# Altium PCB pcb.PcbDoc (part 8 of 9)
Units mil, origin at the board's own origin, x right, y up, seen from the top; angles counter-clockwise.
Board outline 3937.01 x 3937.01 mil, 4 copper layers (Top Layer, Ground plane, Power plane, Bottom Layer), stack 51.4 mil thick; 310 components, 276 nets, 1704 pads, 977 vias.
Unrouted connection lines stored in the file: 44.
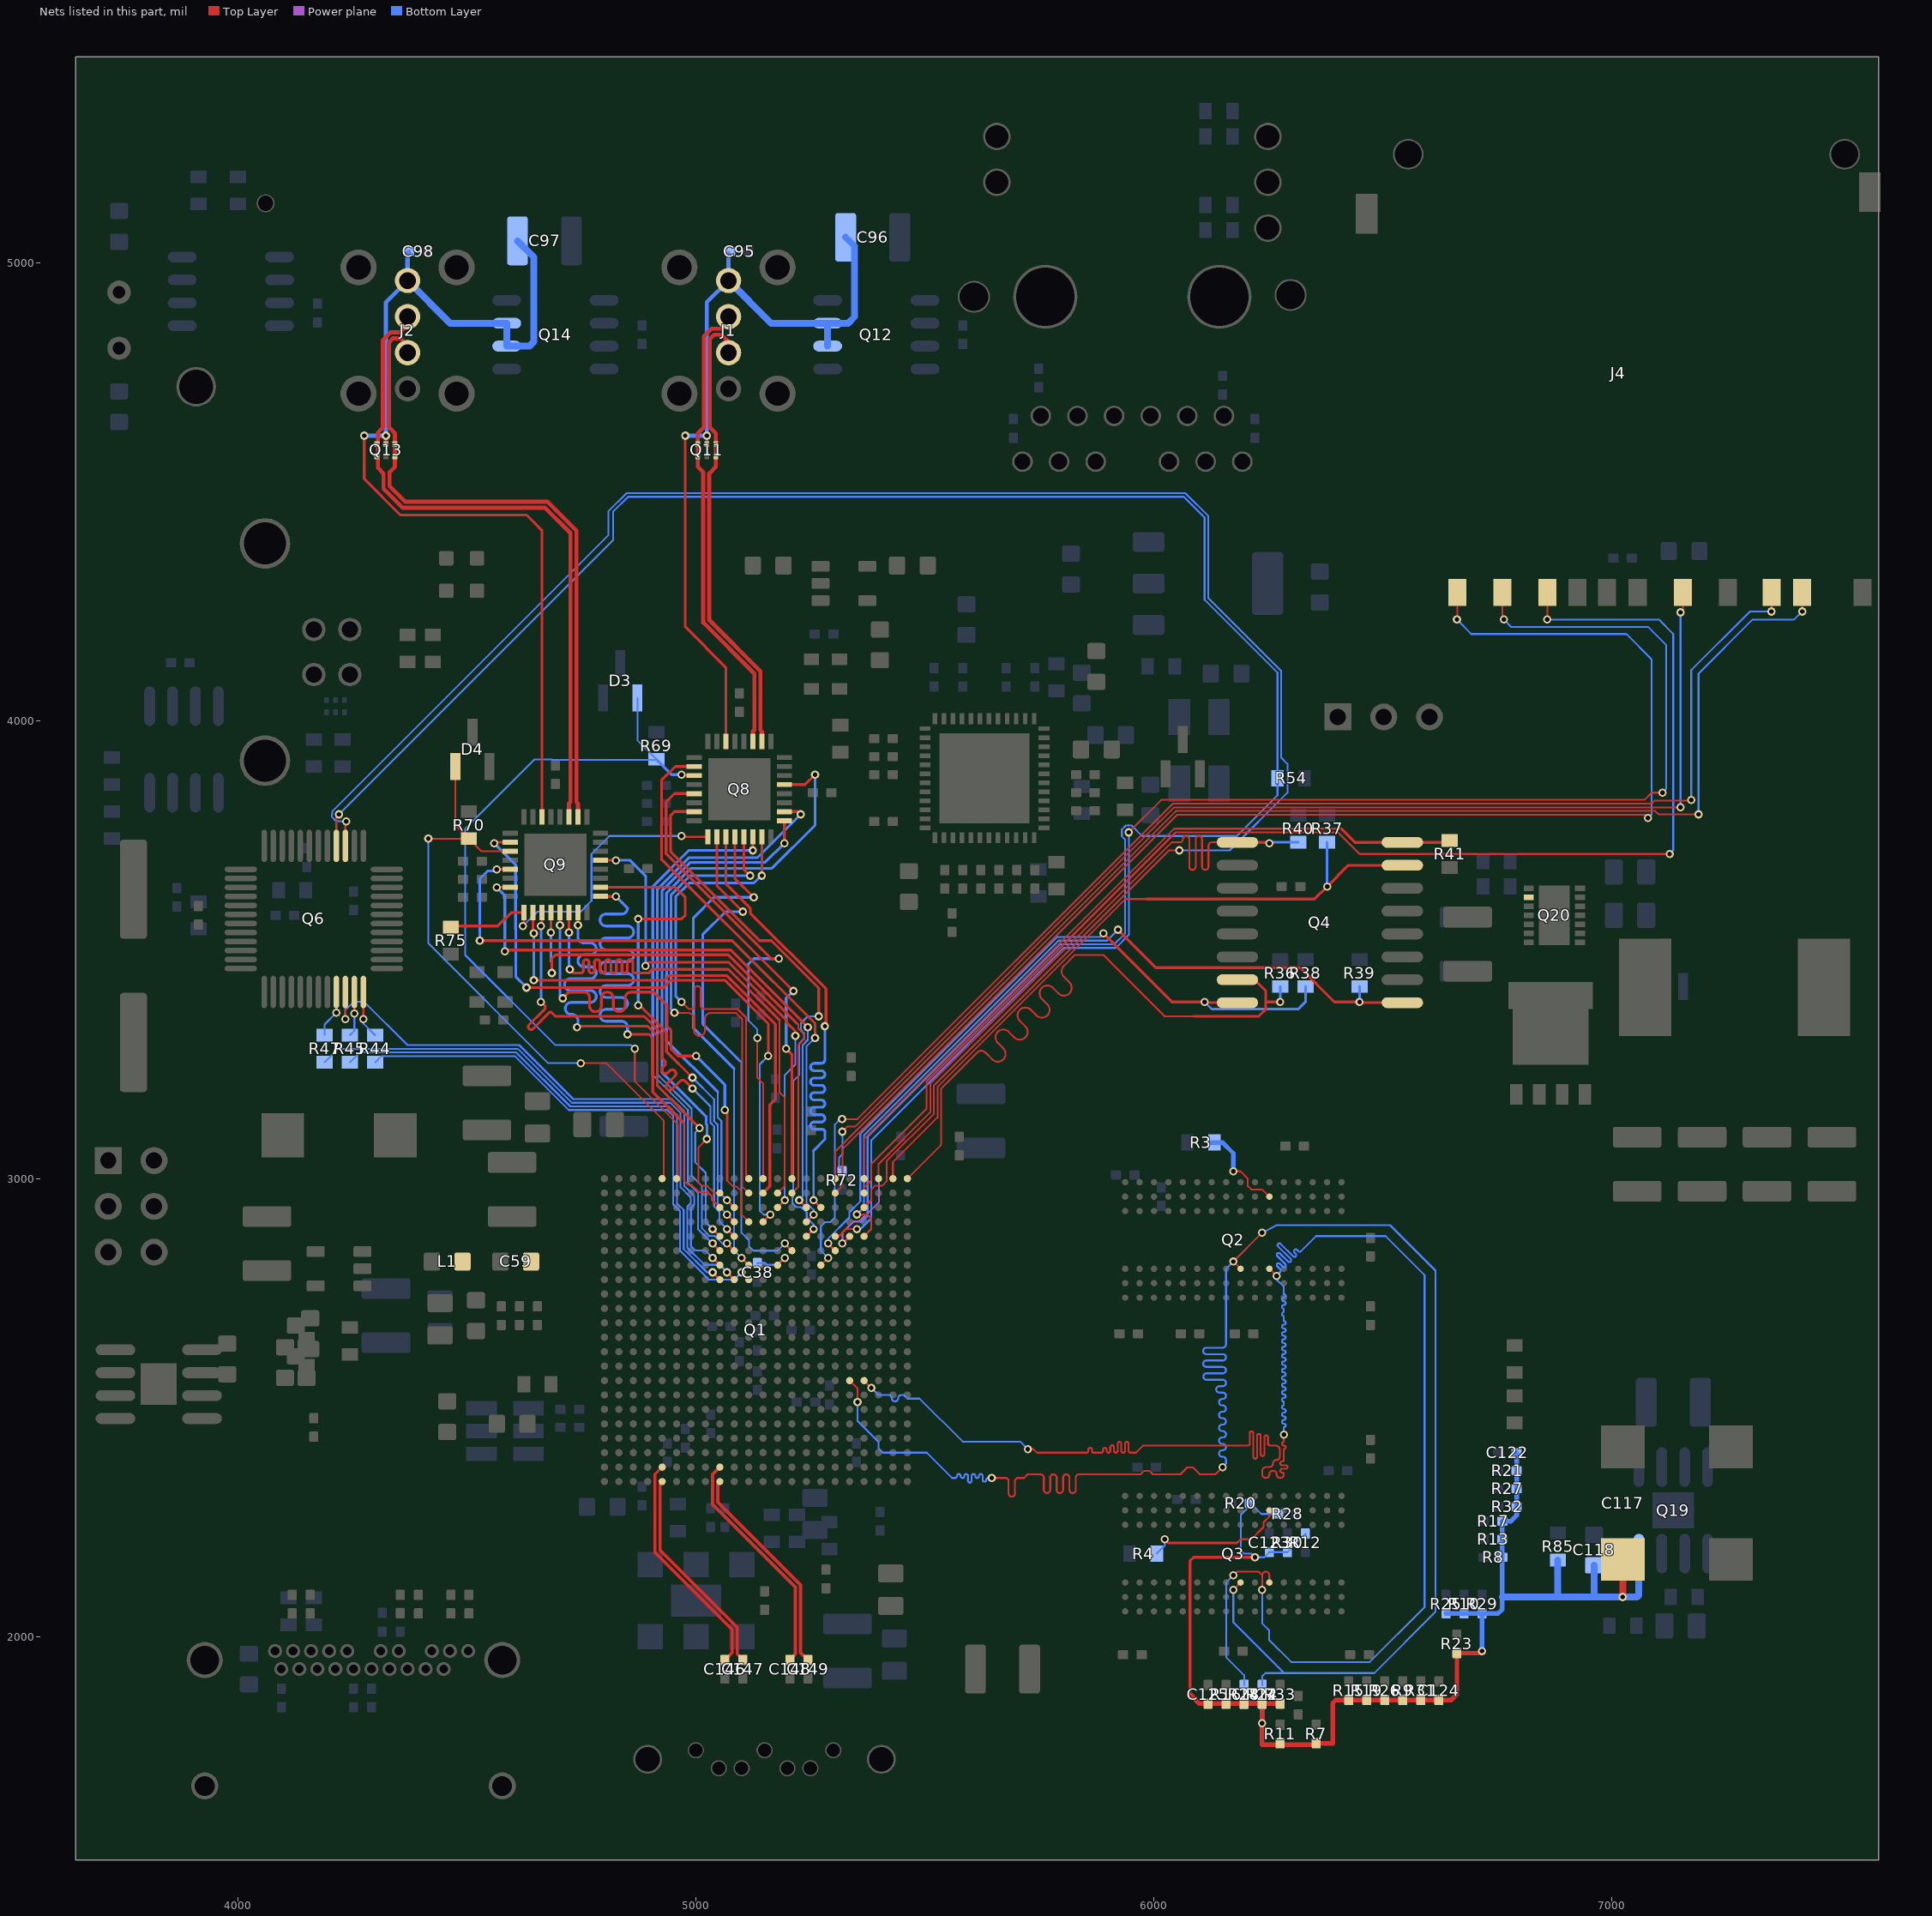
[diagram p9: the nets of this part, all layers, seen from the top]

## Via types
v1: diameter 18, hole 10, Top Layer to Bottom Layer, 932 vias
v2: diameter 19.68, hole 9.84, Top Layer to Bottom Layer, tented both sides, 18 vias
v3: diameter 19.68, hole 9.84, Top Layer to Bottom Layer, 16 vias
v4: diameter 19.68, hole 7.87, Top Layer to Bottom Layer, 11 vias

## Nets (pads, with @x,y where several pads share a name; then routed paths per layer and width w, separated by ;. In a path a pad name is that pad's centre, name@x,y a point inside that pad or via, vN(x,y) a via of type N, cw(c..) or ccw(c..) an arc to the next point about the centre after c; other vN are vias at no path point) (continued)
RAS: Q1.R18 Q2.J3 Q3.J3 R14.1 | length 4166.2
  Top Layer w4: Q1.R18@5335.43,2559.05 5352.62,2541.86 5352.62,2533.66 5352.5,2533.54 5352.5,2512.06 v1(5352.62,2511.93) ; v1(5645.67,2346.46) 5675.42,2346.46 cw(c5675.42,2339.46) 5682.42,2339.46 5682.42,2312.51 ccw(c5689.42,2312.51) 5689.42,2305.51 ccw(c5689.42,2312.51) 5696.42,2312.51 5696.42,2339.46 cw(c5703.42,2339.46) 5703.42,2346.46 5716.54,2346.46 5724.41,2354.33 5752.41,2354.33 cw(c5752.41,2347.33) 5759.41,2347.33 5759.41,2320.38 ccw(c5766.41,2320.38) 5766.41,2313.38 ccw(c5766.41,2320.38) 5773.41,2320.38 5773.41,2347.33 cw(c5780.41,2347.33) 5780.41,2354.33 cw(c5780.41,2347.33) 5787.41,2347.33 5787.41,2320.38 ccw(c5794.41,2320.38) 5794.41,2313.38 ccw(c5794.41,2320.38) 5801.41,2320.38 5801.41,2347.33 cw(c5808.41,2347.33) 5808.41,2354.33 cw(c5808.41,2347.33) 5815.41,2347.33 5815.41,2320.38 ccw(c5822.41,2320.38) 5822.41,2313.38 ccw(c5822.41,2320.38) 5829.41,2320.38 5829.41,2347.33 cw(c5836.41,2347.33) 5836.41,2354.33 5970.91,2354.33 5978.79,2362.2 5989.72,2362.2 5997.59,2354.33 6057.53,2354.33 6072.53,2369.33 6084.95,2369.33 6099.95,2354.33 6133.86,2354.33 v1(6149.61,2370.08) ; v1(6173.23,2102.36) Q3.J3@6188.98,2118.11 ; Q2.J3@6188.98,2803.15 v1(6173.23,2818.9) v1(6236.22,2881.89)
  Bottom Layer w4: v1(5352.62,2511.93) 5352.62,2471 5398.61,2425.01 5398.61,2410.88 5407.73,2401.76 5421.86,2401.76 5422.05,2401.57 5503.94,2401.57 5559.06,2346.46 5565.8,2346.46 ccw(c5565.8,2350.46) 5569.8,2350.46 5569.8,2350.95 cw(c5573.8,2350.95) 5573.8,2354.95 cw(c5573.8,2350.95) 5577.8,2350.95 5577.8,2350.46 ccw(c5581.8,2350.46) 5581.8,2346.46 ccw(c5581.8,2350.46) 5585.8,2350.46 5585.8,2350.95 cw(c5589.8,2350.95) 5589.8,2354.95 cw(c5589.8,2350.95) 5593.8,2350.95 5593.8,2340.19 ccw(c5597.8,2340.19) 5597.8,2336.19 ccw(c5597.8,2340.19) 5601.8,2340.19 5601.8,2350.95 cw(c5605.8,2350.95) 5605.8,2354.95 cw(c5605.8,2350.95) 5609.8,2350.95 5609.8,2350.46 ccw(c5613.8,2350.46) 5613.8,2346.46 ccw(c5613.8,2350.46) 5617.8,2350.46 5617.8,2350.95 cw(c5621.8,2350.95) 5621.8,2354.95 cw(c5621.8,2350.95) 5625.8,2350.95 5625.8,2342.29 ccw(c5629.8,2342.29) 5629.8,2338.29 ccw(c5629.8,2342.29) 5633.8,2342.29 5633.8,2342.46 cw(c5637.8,2342.46) 5637.8,2346.46 v1(5645.67,2346.46) ; v1(6149.61,2370.08) 6157.23,2377.7 6157.23,2385.83 ccw(c6150.23,2385.83) 6150.23,2392.83 6148.86,2392.83 cw(c6148.86,2399.83) 6141.86,2399.83 cw(c6148.86,2399.83) 6148.86,2406.83 6150.23,2406.83 ccw(c6150.23,2413.83) 6157.23,2413.83 ccw(c6150.23,2413.83) 6150.23,2420.83 6148.86,2420.83 cw(c6148.86,2427.83) 6141.86,2427.83 cw(c6148.86,2427.83) 6148.86,2434.83 6150.23,2434.83 ccw(c6150.23,2441.83) 6157.23,2441.83 ccw(c6150.23,2441.83) 6150.23,2448.83 6148.86,2448.83 cw(c6148.86,2455.83) 6141.86,2455.83 cw(c6148.86,2455.83) 6148.86,2462.83 6150.23,2462.83 ccw(c6150.23,2469.83) 6157.23,2469.83 ccw(c6150.23,2469.83) 6150.23,2476.83 6148.86,2476.83 cw(c6148.86,2483.83) 6141.86,2483.83 cw(c6148.86,2483.83) 6148.86,2490.83 6150.23,2490.83 ccw(c6150.23,2497.83) 6157.23,2497.83 ccw(c6150.23,2497.83) 6150.23,2504.83 6148.86,2504.83 cw(c6148.86,2511.83) 6141.86,2511.83 cw(c6148.86,2511.83) 6148.86,2518.83 6150.23,2518.83 ccw(c6150.23,2525.83) 6157.23,2525.83 ccw(c6150.23,2525.83) 6150.23,2532.83 6142.8,2532.83 cw(c6142.8,2539.83) 6135.8,2539.83 cw(c6142.8,2539.83) 6142.8,2546.83 6150.23,2546.83 ccw(c6150.23,2553.83) 6157.23,2553.83 ccw(c6150.23,2553.83) 6150.23,2560.83 6114.8,2560.83 cw(c6114.8,2567.83) 6107.8,2567.83 cw(c6114.8,2567.83) 6114.8,2574.83 6150.23,2574.83 ccw(c6150.23,2581.83) 6157.23,2581.83 ccw(c6150.23,2581.83) 6150.23,2588.83 6114.23,2588.83 cw(c6114.23,2595.83) 6107.23,2595.83 cw(c6114.23,2595.83) 6114.23,2602.83 6150.23,2602.83 ccw(c6150.23,2609.83) 6157.23,2609.83 ccw(c6150.23,2609.83) 6150.23,2616.83 6114.23,2616.83 cw(c6114.23,2623.83) 6107.23,2623.83 cw(c6114.23,2623.83) 6114.23,2630.83 6150.23,2630.83 ccw(c6150.23,2637.83) 6157.23,2637.83 6157.23,2802.9 v1(6173.23,2818.9) ; v1(6173.23,2102.36) 6173.23,2031.5 6284.22,1920.5 ; R14.1@6236.22,1894.29 6236.22,1913.39 6243.34,1920.5 6284.22,1920.5 ; v1(6236.22,2881.89) 6267.72,2898.4 6515.52,2898.4 6614.69,2799.24 6614.69,2054.18 6481.01,1920.5 6284.22,1920.5
RX: Q1.C19 Q6.39 | length 4405.1
  Top Layer w4: Q6.39@4234.25,3726.38 4234.25,3777.56 v1(4236.22,3779.53) ; Q1.C19@5366.93,2937.01 5382.68,2952.76 5382.68,2976.38 5390.55,2984.25 5406.3,2984.25 5416.05,2994 5416.05,3038.1 5519.43,3141.48 5519.43,3203.48 6032.49,3716.54 v1(6055.12,3716.54)
  Bottom Layer w4: v1(4236.22,3779.53) 4235.47,3780.28 4214.26,3780.28 4204.6,3789.94 4204.6,3795.28 4205.47,3796.15 4205.47,3801.49 4808.45,4404.47 4808.45,4456.69 4848.33,4496.57 6068.37,4496.57 6118.61,4446.33 6118.61,4267.21 6277.69,4108.14 6277.69,3919.17 6291.34,3905.51 6291.34,3842.52 6165.35,3716.54 v1(6055.12,3716.54)
SDCLK: J4.5 R72.2 | length 2683.2
  Top Layer w4: v1(5319.69,3102.36) 5330.71,3113.39 5347.16,3113.39 6044.3,3810.53 v1(7149.61,3810.53) ; v1(7149.61,4236.22) 7154.53,4241.14 J4.5@7154.53,4279.53
  Bottom Layer w4: R72.2@5319.69,3019.44 5312.43,3026.69 5312.43,3045.75 5319.69,3053 v1(5319.69,3102.36) ; v1(7149.61,3810.53) v1(7149.61,4236.22)
SDCMD: J4.2 Q1.B19 | length 2999.2
  Top Layer w4: Q1.B19@5366.93,2968.5 5366.93,2980.38 5382.68,2996.13 5382.68,3031.5 5503.43,3152.25 5503.43,3212.09 6047.24,3755.91 6401.57,3755.91 6448.82,3708.66 v1(7125.98,3708.66) ; v1(6858.27,4220.47) 6859.25,4221.46 J4.2@6859.25,4279.53
  Bottom Layer w4: v1(6858.27,4220.47) 7102.36,4220.47 7133.86,4188.98 7133.86,3716.54 v1(7125.98,3708.66)
SDDAT0: J4.7 Q1.G16 | length 3055.8
  Top Layer w4: Q1.G16@5272.44,2811.02 v1(5288.19,2826.77) ; v1(5318.94,3129.88) 5352.34,3129.88 6040.99,3818.53 7086.61,3818.53 7093.61,3825.53 7171.98,3825.53 v1(7173.23,3826.77) ; v1(7348.43,4238.19) J4.7@7348.43,4279.53
  Bottom Layer w4: v1(5288.19,2826.77) 5272.44,2842.52 5272.44,2895.23 5281.98,2904.76 5292.91,2904.76 5303.19,2915.05 5303.19,3118.11 5314.96,3129.88 v1(5318.94,3129.88) ; v1(7173.23,3826.77) 7173.23,4110.24 7301.18,4238.19 v1(7348.43,4238.19)
SDDAT1: J4.8 Q1.A17 | length 2886
  Top Layer w4: Q1.A17@5303.94,3000 5303.94,3058.85 6047.62,3802.53 7094.49,3802.53 7101.74,3795.28 v1(7188.98,3795.28) ; v1(7415.35,4238.19) J4.8@7415.35,4279.53
  Bottom Layer w4: v1(7188.98,3795.28) 7188.98,4102.36 7307.09,4220.47 7397.64,4220.47 v1(7415.35,4238.19)
SDDAT2: J4.9 Q1.B17 | length 3036.5
  Top Layer w4: Q1.B17@5303.94,2968.5 5319.69,2984.25 5319.69,3063.28 6050.93,3794.53 7071.61,3794.53 v1(7078.74,3787.4) ; v1(6661.42,4220.47) 6662.4,4221.46 J4.9@6662.4,4279.53
  Bottom Layer w4: v1(6661.42,4220.47) 6692.91,4188.98 7031.5,4188.98 7086.61,4133.86 7086.61,3795.28 v1(7078.74,3787.4)
SDDAT3: J4.1 Q1.E17 | length 3201.9
  Top Layer w4: Q1.E17@5303.94,2874.02 5311.81,2874.02 5327.56,2889.76 v1(5351.18,2889.76) ; v1(5944.88,3755.91) 6015.75,3826.77 7070.87,3826.77 7086.61,3842.52 v1(7110.24,3842.52) ; J4.1@6760.83,4279.53 6760.83,4223.43 v1(6763.78,4220.47)
  Bottom Layer w4: v1(5351.18,2889.76) 5359.02,2889.76 5382.68,2913.42 5382.68,3083.46 5802.77,3503.56 5916.45,3503.56 5945.01,3532.12 5945.01,3755.78 v1(5944.88,3755.91) ; v1(6763.78,4220.47) 6779.53,4204.72 7078.74,4204.72 7118.11,4165.35 7118.11,3850.39 v1(7110.24,3842.52)
SPICLK: Q1.A19 Q4.16 R41.1 | length 1660.1
  Top Layer w4: Q1.A19@5366.93,3000 5366.93,3086.91 6043.93,3763.91 6409.32,3763.91 6409.45,3763.78
  Top Layer w6: 6409.45,3763.78 6439.17,3734.06 Q4.16@6542.32,3734.06 6641.54,3734.06 R41.1@6645.67,3738.19
SPICS: Q1.A22 Q4.7 R36.1 | length 1574.8
  Top Layer w4: Q1.A22@5461.42,3000 5535.43,3074.01 5535.43,3196.85 5614.17,3275.59 cw(c5622.84,3266.93) 5631.5,3275.59 5646.87,3260.22 ccw(c5658.89,3272.24) 5670.92,3260.22 ccw(c5658.89,3272.24) 5670.92,3284.26 5658.9,3296.28 cw(c5670.92,3308.3) 5658.9,3320.32 cw(c5670.92,3308.3) 5682.94,3320.32 5694.96,3308.3 ccw(c5706.98,3320.32) 5719,3308.3 ccw(c5706.98,3320.32) 5719,3332.34 5706.98,3344.36 cw(c5719,3356.38) 5706.98,3368.4 cw(c5719,3356.38) 5731.02,3368.4 5743.04,3356.38 ccw(c5755.06,3368.41) 5767.08,3356.38 ccw(c5755.06,3368.41) 5767.08,3380.43 5755.07,3392.44 cw(c5767.09,3404.46) 5755.07,3416.48 cw(c5767.09,3404.46) 5779.11,3416.48 5791.12,3404.47 ccw(c5803.14,3416.49) 5815.17,3404.47 ccw(c5803.14,3416.49) 5815.17,3428.51 5803.15,3440.53 cw(c5815.17,3452.55) 5803.15,3464.57 5826.77,3488.19 5889.76,3488.19 6023.62,3354.33 6086.61,3354.33
  Top Layer w6: 6086.61,3354.33 6228.35,3354.33 6244.09,3370.08 6244.09,3385.83 ; Q4.7@6195.87,3434.06 6219.49,3434.06 6244.09,3409.45 6244.09,3385.83 ; v1(6275.59,3385.83) 6244.09,3385.83
  Bottom Layer w6: v1(6275.59,3385.83) R36.1@6275.59,3419.29
SPID0: Q1.A21 Q4.15 R37.1 | length 1552.3
  Top Layer w4: Q1.A21@5429.92,3000 5429.92,3036.22 5527.43,3133.73 5527.43,3200.16 5937.51,3610.24 5984.25,3610.24
  Top Layer w6: 5984.25,3610.24 6350.39,3610.24 v1(6377.95,3637.8) 6424.21,3684.06 Q4.15@6542.32,3684.06
  Bottom Layer w6: v1(6377.95,3637.8) 6377.95,3685.04 R37.1@6377.95,3734.25
SPID1: Q1.F17 Q4.8 R38.1 | length 1625.4
  Top Layer w5: v1(5288.19,2858.27) Q1.F17@5303.94,2842.52
  Top Layer w6: v1(5889.76,3535.43) 6039.37,3385.83 v1(6110.24,3385.83) 6112.01,3384.06 Q4.8@6182.09,3384.06
  Bottom Layer w4: v1(5288.19,2858.27) 5288.19,2868.55 5334.69,2915.05 5334.69,2926.48 5358.68,2950.47 5358.68,3097.84 5788.4,3527.56 5881.89,3527.56 v1(5889.76,3535.43) ; v1(6110.24,3385.83) 6125.98,3370.08
  Bottom Layer w6: 6125.98,3370.08 6314.96,3370.08 6330.71,3385.83 R38.1@6330.71,3419.29
SPID2: Q1.E19 Q4.9 R39.1 | length 1724.9
  Top Layer w4: v1(5351.18,2921.76) 5351.69,2921.26 5374.8,2921.26 5382.68,2913.39 5382.68,2889.76 Q1.E19@5366.93,2874.02 ; v1(6448.82,3385.83) v1@6450.59,3384.06
  Top Layer w6: v1(5921.26,3543.31) 6003.94,3460.63 6318.9,3460.63 6393.7,3385.83 v1(6448.82,3385.83) ; v1@6450.59,3384.06 Q4.9@6542.32,3384.06
  Bottom Layer w4: v1@5355.12,2921.76 v1(5351.18,2921.76) 5366.68,2937.26 5366.68,3094.53 5791.71,3519.56 5897.51,3519.56 v1(5921.26,3543.31)
  Bottom Layer w6: v1(6448.82,3385.83) R39.1@6448.82,3419.29
SPID3: Q1.A20 Q4.1 R40.1 | length 1542.5
  Top Layer w4: Q1.A20@5398.43,3000 5398.43,3031.79 5511.43,3144.79 5511.43,3206.79 6038.7,3734.06 6055.12,3734.06 6056.13,3734.06 ccw(c6056.13,3740.91) 6062.98,3740.91 cw(c6069.98,3740.91) 6069.98,3747.91 cw(c6069.98,3740.91) 6076.98,3740.91 6076.98,3734.06 6076.98,3681.06 ccw(c6083.98,3681.06) 6083.98,3674.06 ccw(c6083.98,3681.06) 6090.98,3681.06 6090.98,3734.06 6090.98,3740.91 cw(c6097.98,3740.91) 6097.98,3747.91 cw(c6097.98,3740.91) 6104.98,3740.91 6104.98,3734.06 6104.98,3681.06 ccw(c6111.98,3681.06) 6111.98,3674.06 ccw(c6111.98,3681.06) 6118.98,3681.06 6118.98,3727.06 cw(c6125.98,3727.06) 6125.98,3734.06 Q4.1@6182.09,3734.06
  Top Layer w6: Q4.1@6182.09,3734.06 6250.2,3734.06 v1(6251.97,3732.28)
  Bottom Layer w6: v1(6251.97,3732.28) 6253.94,3734.25 R40.1@6314.96,3734.25
SRX_N: C149.2 Q1.AB9 | length 472.5
  Top Layer w7.2: Q1.AB9@5051.97,2338.58 5047.44,2334.05 5047.44,2293.6 5228.35,2112.69 5228.35,1965.16 C149.2@5244.09,1949.41
SRX_P: C148.2 Q1.AA9 | length 507.3
  Top Layer w7.2: Q1.AA9@5051.97,2370.08 5036.22,2354.33 5036.22,2288.96 5217.13,2108.05 5217.13,1961.82 C148.2@5204.72,1949.41
STX_N: C147.2 Q1.AB5 | length 466
  Top Layer w7.2: Q1.AB5@4925.98,2338.58 4921.45,2334.05 4921.45,2188.78 5089.96,2020.28 5089.96,1961.82 C147.2@5102.36,1949.41
STX_P: C146.2 Q1.AA5 | length 503.5
  Top Layer w5: 4910.24,2354.33 Q1.AA5@4925.98,2370.08
  Top Layer w7.2: 4910.24,2354.33 4910.24,2314.96 4910.24,2184.14 5078.74,2015.63 5078.74,1965.16 C146.2@5062.99,1949.41
TCK: Q1.H11 R44.2 | length 1199.8
  Top Layer w5: v1(5099.21,2795.28) Q1.H11@5114.96,2779.53
  Bottom Layer w4: R44.2@4299.21,3253.94 4312.74,3267.46 4604.11,3267.46 4721.96,3149.61 4937.01,3149.61 4950.23,3136.39 4950.23,2943.23 4964.98,2928.48 4964.98,2842.86 5028.31,2779.53 5083.47,2779.53 v1(5099.21,2795.28)
TDI: Q1.H9 R45.2 | length 1185.5
  Top Layer w5: v1(5036.22,2795.28) Q1.H9@5051.97,2779.53
  Bottom Layer w4: R45.2@4244.09,3253.94 4265.62,3275.46 4607.42,3275.46 4725.28,3157.61 4940.32,3157.61 4958.23,3139.7 4958.23,2946.54 4972.98,2931.79 4972.98,2846.18 5023.88,2795.28 v1(5036.22,2795.28)
TDO: Q1.G9 Q6.22 | length 1311.2
  Top Layer w4: v1(4234.25,3348.43) Q6.22@4234.25,3407.48
  Top Layer w5: v1(5036.22,2826.77) Q1.G9@5051.97,2811.02
  Bottom Layer w4: v1(4234.25,3348.43) 4234.25,3368.11 4251.97,3385.83 4275.59,3385.83 4369.95,3291.46 4614.05,3291.46 4731.91,3173.61 4946.95,3173.61 4974.23,3146.33 4974.23,2984.28 4996.23,2962.28 4996.23,2943.23 4988.98,2935.98 4988.98,2852.8 4998.51,2843.27 5019.72,2843.27 v1(5036.22,2826.77)
TMS: Q1.H10 R47.2 | length 1284.8
  Top Layer w5: v1(5067.72,2795.28) Q1.H10@5083.46,2779.53
  Bottom Layer w4: R47.2@4188.98,3253.94 4218.5,3283.46 4610.73,3283.46 4728.59,3165.61 4943.64,3165.61 4966.23,3143.01 4966.23,2980.97 4988.23,2958.97 4988.23,2946.54 4980.98,2939.29 4980.98,2849.49 5018.69,2811.77 5051.22,2811.77 5051.97,2811.02
  Bottom Layer w5: 5051.97,2811.02 v1(5067.72,2795.28)
TX: Q1.E18 Q6.40 R54.1 | length 4804.8
  Top Layer w4: Q6.40@4214.57,3726.38 4214.57,3789.37 v1(4220.47,3795.28)
  Top Layer w5: v1(5319.69,2858.27) Q1.E18@5335.43,2874.02
  Power plane w4: v1(5319.69,2858.27) 5319.69,2881.89 5344.56,2906.76 5357.39,2906.76 5399.17,2948.54 5399.17,2990.47
  Bottom Layer w4: v1(4220.47,3795.28) 4818.65,4393.45 4818.65,4455.57 4851.64,4488.57 6065.06,4488.57 6110.61,4443.01 6110.61,4263.9 6269.69,4104.83 R54.1@6269.69,3874.02 6269.69,3836.61 6181.1,3748.03 5973.97,3748.03 5951.1,3770.91 5945.63,3770.91 5944.88,3771.65 5944.13,3770.91 5938.67,3770.91 5929.88,3762.12 5929.88,3748.78 5929.13,3748.03 5937.01,3740.16 5937.01,3535.43 5913.13,3511.56 5795.02,3511.56 5374.68,3091.21 5374.68,2917.82 5362.37,2905.51 5343.31,2905.51 5319.69,2881.89 v1(5319.69,2858.27)
USB0_N: J1.2 Q8.19 Q11.1 Q11.6 | length 1019.8
  Top Layer w9: J1.2@5070.87,4881.89 5070.87,4871.28 5055.12,4855.54 5033.98,4855.54 5030.17,4851.72 5017.11,4838.67 5017.11,4640.29 5003.94,4627.11 Q11.6@5003.94,4603.82 Q11.1@5003.94,4577.26 5003.94,4553.99 5015.75,4542.18 5015.75,4213.96 5127.35,4102.36 5127.35,3979.7 5124.02,3976.37 Q8.19@5124.02,3954.72
USB0_P: J1.3 Q8.18 Q11.3 Q11.4 | length 1012.4
  Top Layer w9: J1.3@5070.87,4803.15 5070.87,4826.77 5055.12,4842.52 5039.37,4842.52 5030.13,4833.28 5030.13,4640.29 5043.31,4627.11 Q11.4@5043.31,4603.82 Q11.3@5043.31,4577.26 5043.31,4553.99 5028.76,4539.45 5028.76,4219.36 5140.37,4107.75 5140.37,3979.7 5143.7,3976.37 Q8.18@5143.7,3954.72
USB0_VBUS: C95.2 C96.2 J1.1 Q8.22 Q11.5 Q12.6 Q12.7 | length 1737.6
  Top Layer w6: v1(4976.38,4622.05) 4976.38,4204.72 5064.96,4116.14 Q8.22@5064.96,3954.72 ; Q11.5@5023.62,4603.82 v1(5023.62,4622.05)
  Bottom Layer w9: v1(4976.38,4622.05) v1(5023.62,4622.05) 5023.62,4913.39 J1.1@5070.87,4960.63
  Bottom Layer w10: J1.1@5070.87,4960.63 C95.2@5070.87,5019.09
  Bottom Layer w15: J1.1@5070.87,4960.63 5163.98,4867.52 Q12.7@5287.4,4867.52 ; Q12.6@5287.4,4817.52 Q12.7@5287.4,4867.52 ; C96.2@5326.77,5055.12 5346.46,5035.43 5346.46,4881.89 5332.09,4867.52 Q12.7@5287.4,4867.52
USB0CLK: Q1.A14 Q8.26 | length 1084.4
  Top Layer w6: Q8.26@4996.06,3899.61 4954.72,3899.61 4924.63,3869.51 4924.63,3697.42 v1(5212.6,3409.45) ; v1(5196.85,3283.46) 5209.45,3270.87 Q1.A14@5209.45,3000
  Bottom Layer w6: v1(5196.85,3283.46) 5196.85,3393.7 v1(5212.6,3409.45)
USB0D0: Q1.C16 Q8.3 | length 1163.9
  Top Layer w5: v1(5256.69,2952.76) Q1.C16@5272.44,2937.01
  Top Layer w6: Q8.3@5064.96,3746.06 5064.96,3643.7 5118.36,3590.3 5118.36,3579.82 5283.72,3414.47 5283.72,3335.21 v1(5281.34,3332.83)
  Bottom Layer w4: 5256.65,3060.93 v1(5256.69,2952.76) v1(5256.69,2952.76)
  Bottom Layer w6: 5256.65,3060.93 5281.34,3085.61 5281.34,3102.36 ccw(c5276.11,3102.36) 5276.11,3107.59 5257.94,3107.59 cw(c5257.94,3115.59) 5249.94,3115.59 cw(c5257.94,3115.59) 5257.94,3123.59 5273.34,3123.59 ccw(c5273.34,3131.59) 5281.34,3131.59 ccw(c5273.34,3131.59) 5273.34,3139.59 5257.94,3139.59 cw(c5257.94,3147.59) 5249.94,3147.59 cw(c5257.94,3147.59) 5257.94,3155.59 5273.34,3155.59 ccw(c5273.34,3163.59) 5281.34,3163.59 ccw(c5273.34,3163.59) 5273.34,3171.59 5257.94,3171.59 cw(c5257.94,3179.59) 5249.94,3179.59 cw(c5257.94,3179.59) 5257.94,3187.59 5273.34,3187.59 ccw(c5273.34,3195.59) 5281.34,3195.59 ccw(c5273.34,3195.59) 5273.34,3203.59 5257.94,3203.59 cw(c5257.94,3211.59) 5249.94,3211.59 cw(c5257.94,3211.59) 5257.94,3219.59 5273.34,3219.59 ccw(c5273.34,3227.59) 5281.34,3227.59 ccw(c5273.34,3227.59) 5273.34,3235.59 5257.94,3235.59 cw(c5257.94,3243.59) 5249.94,3243.59 cw(c5257.94,3243.59) 5257.94,3251.59 5273.34,3251.59 ccw(c5273.34,3259.59) 5281.34,3259.59 5281.34,3267.59 5281.34,3275.59 v1(5281.34,3332.83)
USB0D1: Q1.G11 Q8.4 | length 1107.7
  Top Layer w5: v1(5099.21,2826.77) Q1.G11@5114.96,2811.02
  Top Layer w6: Q8.4@5084.65,3746.06 5084.65,3655.51 v1(5125.98,3614.17)
  Bottom Layer w4: 5083.21,3239.63 5083.21,2842.78 v1(5099.21,2826.77)
  Bottom Layer w6: 5083.21,3239.63 4994.5,3328.33 4994.5,3396.6 4994.25,3396.85 4994.25,3569.44 5038.99,3614.17 v1(5125.98,3614.17)
USB0D2: Q1.B11 Q8.5 | length 1159.6
  Top Layer w4: v1(4952.76,3362.2) 4953.41,3361.55 4976.38,3361.55 4983.5,3361.55 cw(c4983.5,3349.55) 4995.5,3349.55 4995.5,3323.55 ccw(c5007.5,3323.55) 5007.5,3311.55 ccw(c5007.5,3323.55) 5019.5,3323.55 5019.5,3349.55 cw(c5031.5,3349.55) 5031.5,3361.55 5087.27,3361.55 5101.09,3347.73 5101.09,2982.38 Q1.B11@5114.96,2968.5
  Top Layer w6: Q8.5@5104.33,3746.06 5104.33,3675.2 v1(5118.11,3661.42)
  Bottom Layer w6: v1(4952.76,3362.2) 4945.51,3369.45 4945.51,3441.12 4945.76,3441.37 4945.76,3495.64 4945.51,3495.89 4945.51,3619.62 4987.31,3661.42 v1(5118.11,3661.42)
USB0D3: Q1.F9 Q8.6 | length 1137.4
  Top Layer w5: v1(5036.22,2858.27) Q1.F9@5051.97,2842.52
  Top Layer w6: v1(5124.02,3716.54) Q8.6@5124.02,3746.06
  Bottom Layer w4: 4905.51,3226.36 4982.23,3149.64 4982.23,2990.87 5004.6,2968.5 5004.6,2888.86 5035.19,2858.27 v1(5036.22,2858.27)
  Bottom Layer w6: 4905.51,3226.36 4905.51,3457.69 4905.76,3457.94 4905.76,3479.07 4905.51,3479.32 4905.51,3637.8 4984.25,3716.54 v1(5124.02,3716.54)
USB0D4: Q1.A11 Q8.7 | length 1124.1
  Top Layer w4: v1(4968.5,3385.83) 4984.13,3370.2 4989.5,3370.2 ccw(c4989.5,3377.2) 4996.5,3377.2 4996.5,3413.2 cw(c5003.5,3413.2) 5003.5,3420.2 cw(c5003.5,3413.2) 5010.5,3413.2 5010.5,3377.2 ccw(c5017.5,3377.2) 5017.5,3370.2 5090.5,3370.2 5109.09,3351.62 5109.09,3005.87 Q1.A11@5114.96,3000
  Top Layer w6: v1(5143.7,3661.42) Q8.7@5143.7,3746.06
  Bottom Layer w6: v1(4968.5,3385.83) 4955.51,3398.82 4955.51,3436.98 4955.76,3437.23 4955.76,3499.78 4955.51,3500.03 4955.51,3615.48 4985.7,3645.67 5103.36,3645.67 5103.61,3645.42 5126.73,3645.42 5142.73,3661.42 v1(5143.7,3661.42)
USB0D5: Q1.B9 Q8.9 | length 1100.9
  Top Layer w4: v1(5023.61,3086.61) 5005.47,3068.47 5005.47,2991.38 5012.6,2984.25 5024.41,2984.25 5040.16,2968.5 Q1.B9@5051.97,2968.5
  Top Layer w6: v1(5192.91,3732.28) Q8.9@5192.91,3781.5
  Bottom Layer w6: v1(5023.61,3086.61) 5023.87,3086.87 5023.87,3116.86 5022.37,3118.37 5022.37,3135.11 4925.51,3231.97 4925.51,3449.4 4925.76,3449.66 4925.76,3487.35 4925.51,3487.6 4925.51,3627.91 4988.14,3690.54 5151.17,3690.54 v1(5192.91,3732.28)
USB0D6: Q1.F10 Q8.10 | length 1289.6
  Top Layer w5: v1(5067.72,2858.27) Q1.F10@5083.46,2842.52
  Top Layer w6: Q8.10@5192.91,3801.18 5222.42,3801.18 v1(5228.34,3795.27)
  Bottom Layer w4: 4914.8,3228.38 4990.23,3152.95 4990.23,3006.62 5012.6,2984.25 5012.6,2892.17 5030.01,2874.76 5040.94,2874.76 5057.43,2858.27 v1(5067.72,2858.27)
  Bottom Layer w6: 4915.51,3229.09 4915.51,3453.55 4915.76,3453.8 4915.76,3483.21 4915.51,3483.46 4915.51,3632.05 4984,3700.54 5133.6,3700.54 v1(5228.34,3795.27)
USB0D7: Q1.C10 Q8.13 | length 1320
  Top Layer w5: v1(5067.72,2952.76) Q1.C10@5083.46,2937.01
  Top Layer w6: Q8.13@5192.91,3860.24 5238.19,3860.24 v1(5259.84,3881.89)
  Bottom Layer w4: 5047.5,3188.72 5047.5,3133.86 5055.37,3125.98 5055.37,2965.1 v1(5067.72,2952.76)
  Bottom Layer w6: 5047.5,3188.72 4935.51,3300.71 4935.51,3445.26 4935.76,3445.51 4935.76,3491.49 4935.51,3491.75 4935.51,3623.76 4989.17,3677.42 5165.61,3677.42 5259.84,3771.65 v1(5259.84,3881.89)
USB0DIR: Q1.E15 Q8.31 | length 1198.7
  Top Layer w5: Q1.E15@5240.95,2874.02 v1(5256.69,2889.76)
  Top Layer w6: Q8.31@4996.06,3801.18 4952.76,3801.18 4944.63,3793.06 4944.63,3713.58 5138.52,3519.68 5164.36,3519.68 5267.97,3416.08 5267.97,3354.58 v1(5267.72,3354.33)
  Bottom Layer w4: v1(5256.69,2889.76) 5256.69,2900.05 5241.69,2915.05 5241.69,2925.98 5229.91,2937.76 5218.98,2937.76 5210.2,2946.54 5210.2,2958.97 5211.85,2960.62 5211.85,3212.6 5224.94,3225.69 5224.94,3294.82 5236.09,3305.97 5236.09,3317.5 5229.09,3324.5 5229.09,3339.33 5244.09,3354.33 v1(5267.72,3354.33)
USB0NXT: Q1.F14 Q8.2 | length 1128.8
  Top Layer w5: v1(5193.7,2858.27) Q1.F14@5209.45,2842.52
  Top Layer w6: Q8.2@5045.28,3746.06 5045.28,3639.76 v1(5102.36,3582.68)
  Bottom Layer w4: 5096.04,3256.68 5099.21,3253.52 5099.21,2881.9 5115.71,2865.39 5115.71,2852.05 5125.24,2842.52 5177.95,2842.52 v1(5193.7,2858.27)
  Bottom Layer w6: 5096.04,3256.68 5014.5,3338.22 5014.5,3532.58 5064.6,3582.68 v1(5102.36,3582.68)
USB0RESET: D3.1 Q1.A6 Q8.27 R69.2 | length 1783.8
  Top Layer w4: v1(4866.14,3283.46) 4866.14,3212.6 4960.63,3118.11 4960.63,3003.15 Q1.A6@4957.48,3000 ; v1@4970.47,3879.92 Q8.27@4996.06,3879.92
  Top Layer w6: v1(4968.5,3881.89) v1@4970.47,3879.92
  Bottom Layer w4: v1(4866.14,3283.46) 4858.27,3291.34 4692.91,3291.34 4496.06,3488.19 4496.06,3763.78 4647.64,3915.35 4685.48,3915.35 4686.7,3914.13 4912.17,3914.13 R69.2@4913.39,3915.35 4872.05,3956.69 D3.1@4872.05,4049.21
  Bottom Layer w6: R69.2@4913.39,3915.35 4946.85,3881.89 v1(4968.5,3881.89)
USB0STP: Q1.A12 Q8.29 | length 1077
  Top Layer w4: v1(5133.85,3307.08) 5133.86,3220.47 5146.46,3207.87 Q1.A12@5146.46,3000
  Top Layer w6: Q8.29@4996.06,3840.55 4952.76,3840.55 4934.63,3822.43 4934.63,3709.43 5163.75,3480.32 v1(5181.1,3480.32)
  Bottom Layer w4: 5114.21,3468.54 5114.21,3345.5 5133.86,3325.84 v1(5133.85,3307.08)
  Bottom Layer w5.98: 5114.21,3468.54 5125.98,3480.32 v1(5181.1,3480.32)
USB1_N: J2.2 Q9.19 Q13.1 Q13.6 | length 1489.5
  Top Layer w9: J2.2@4370.08,4881.89 4370.08,4863.41 4354.33,4847.66 4333.19,4847.66 4316.33,4830.8 4316.33,4640.29 4305.33,4629.3 4305.33,4551.81 4317.69,4539.45 4317.69,4506.42 4321.51,4502.61 4359.55,4464.57 4670.66,4464.57 4725.78,4409.45 4725.78,3822.23 4722.44,3818.9 Q9.19@4722.44,3789.37
USB1_P: J2.3 Q9.18 Q13.3 Q13.4 | length 1465.9
  Top Layer w9: J2.3@4370.08,4803.15 4370.08,4818.9 4354.33,4834.65 4338.58,4834.65 4329.34,4825.41 4329.34,4640.29 4342.52,4627.11 Q13.4@4342.52,4603.82 Q13.3@4342.52,4577.26 4342.52,4553.99 4330.71,4542.18 4330.71,4511.81 4364.94,4477.58 4676.05,4477.58 4738.79,4414.84 4738.79,3822.23 4742.13,3818.9 Q9.18@4742.13,3789.37
USB1_VBUS: C97.1 C98.2 J2.1 Q9.22 Q13.5 Q14.6 Q14.7 | length 2245.9
  Top Layer w6: v1(4275.59,4622.05) 4275.59,4527.56 4354.33,4448.82 4629.92,4448.82 4663.39,4415.35 Q9.22@4663.39,3789.37 ; Q13.5@4322.83,4603.82 v1(4322.83,4622.05)
  Bottom Layer w9: v1(4275.59,4622.05) v1(4322.83,4622.05) 4322.83,4913.39 J2.1@4370.08,4960.63
  Bottom Layer w10: J2.1@4370.08,4960.63 4370.08,5020.28 C98.2@4373.43,5023.62
  Bottom Layer w15: J2.1@4370.08,4960.63 4463.19,4867.52 Q14.7@4586.61,4867.52 Q14.6@4586.61,4817.52 4636.42,4817.52 4645.67,4826.77 4645.67,5011.81 C97.1@4610.24,5047.24
USB1CLK: Q1.D12 Q9.26 | length 1419.5
  Top Layer w5: Q1.D12@5146.46,2905.51 v1(5162.21,2921.26)
  Top Layer w6: v1(4559.06,3732.28) 4561.02,3734.25 Q9.26@4594.49,3734.25 ; v1(4629.92,3417.07) 4928.88,3417.07 4944.88,3433.07 5062.99,3433.07 5157.85,3338.21 5157.85,3268.09 v1(5157.48,3267.72)
  Bottom Layer w4: v1(5157.48,3267.72) 5139.21,3249.44 5139.21,2930.02 5147.96,2921.26 v1(5162.21,2921.26)
  Bottom Layer w6: v1(4559.06,3732.28) 4606.05,3685.29 4606.05,3544.55 4606.3,3544.3 4606.3,3440.69 v1(4629.92,3417.07)
USB1D0: Q1.E10 Q9.3 | length 1200.4
  Top Layer w5: v1(5067.72,2889.76) Q1.E10@5083.46,2874.02
  Top Layer w6: v1(4661.42,3385.83) 4669.29,3377.95 cw(c4665.05,3373.71) 4669.29,3369.47 4635.35,3335.53 ccw(c4639.59,3331.28) 4635.35,3327.04 ccw(c4639.59,3331.28) 4643.84,3327.04 4679,3362.2 cw(c4682.02,3359.18) 4685.04,3362.2 4692.91,3354.33 4886.55,3354.33 4925.51,3315.37 4925.51,3263.46 4929.13,3259.84 4931.12,3257.85 cw(c4925.47,3252.2) 4931.12,3246.54 4927.85,3243.27 ccw(c4933.51,3237.61) 4927.85,3231.96 ccw(c4933.51,3237.61) 4939.17,3231.96 4942.44,3235.23 cw(c4948.09,3229.57) 4953.75,3235.23 cw(c4948.09,3229.57) 4953.75,3223.91 4936.7,3206.86 ccw(c4942.36,3201.21) 4936.7,3195.55 ccw(c4942.36,3201.21) 4948.01,3195.55 4965.06,3212.6 cw(c4970.72,3206.94) 4976.38,3212.6 v1(4992.13,3196.85) ; v1(4661.42,3551.18) 4663.39,3553.15 Q9.3@4663.39,3580.71
  Bottom Layer w4: v1(4992.13,3196.85) 5031.37,3157.61 5031.37,3122.1 5039.37,3114.1 5039.37,2939.32 5051.22,2927.47 5051.22,2906.26 v1(5067.72,2889.76)
  Bottom Layer w6: v1(4661.42,3385.83) 4661.42,3426.19 4661.67,3426.44 4661.67,3550.93 v1(4661.42,3551.18)
USB1D1: Q1.B14 Q9.4 | length 1152.8
  Top Layer w4: Q1.B14@5209.45,2968.5 5223.32,2982.38 5223.32,3291.34 5236.22,3304.24 5236.22,3314.96 5223.32,3327.86 5223.32,3335.73 5220.47,3338.58
  Top Layer w6: v1(4683.07,3537.4) Q9.4@4683.07,3580.71 ; v1(4685.04,3448.82) 4685.04,3480.32 4693.23,3488.5 5070.55,3488.5 5220.47,3338.58
  Bottom Layer w6: v1(4683.07,3537.4) 4683.07,3474.41 4685.04,3472.44 v1(4685.04,3448.82)
USB1D2: Q1.D11 Q9.5 | length 1136.2
  Top Layer w4: 5067.72,2996.13 5081.47,2982.38 5089.21,2982.38 5099.21,2972.38 5099.21,2921.26 Q1.D11@5114.96,2905.51
  Top Layer w6: v1(4702.76,3553.15) Q9.5@4702.76,3580.71 ; v1(4708.66,3393.7) 4722.03,3407.07 4755.91,3407.07 cw(c4755.91,3395.71) 4767.27,3395.71 4767.27,3377.33 ccw(c4780.27,3377.33) 4780.27,3364.33 ccw(c4780.27,3377.33) 4793.27,3377.33 4793.27,3394.07 cw(c4806.27,3394.07) 4806.27,3407.07 cw(c4806.27,3394.07) 4819.27,3394.07 4819.27,3377.33 ccw(c4832.27,3377.33) 4832.27,3364.33 ccw(c4832.27,3377.33) 4845.27,3377.33 4845.27,3394.07 cw(c4858.27,3394.07) 4858.27,3407.07 4907.64,3407.07 4937.01,3377.7 4937.01,3369.08 4936.76,3368.83 4936.76,3332.41 4945.51,3323.66 4945.51,3282.83 4960.63,3267.72 v1(5000,3267.72) ; v1(5062.99,3149.61) 5067.72,3144.88 5067.72,2996.13
  Bottom Layer w6: v1(4702.76,3553.15) 4702.76,3399.61 v1(4708.66,3393.7) ; v1(5000,3267.72) 5062.99,3204.72 v1(5062.99,3149.61)
USB1D3: Q1.B13 Q9.6 | length 1269.2
  Top Layer w4: Q1.B13@5177.95,2968.5 5193.7,2984.25 5193.7,3176.63 5182.48,3187.85 5182.48,3345.08
  Top Layer w6: v1(4722.44,3537.4) Q9.6@4722.44,3580.71 ; v1(4724.41,3456.69) 4732.54,3448.57 4748.03,3448.57 ccw(c4748.03,3454.57) 4754.03,3454.57 4754.03,3472.19 cw(c4760.03,3472.19) 4760.03,3478.19 cw(c4760.03,3472.19) 4766.03,3472.19 4766.03,3454.57 ccw(c4772.03,3454.57) 4772.03,3448.57 ccw(c4772.03,3454.57) 4778.03,3454.57 4778.03,3472.19 cw(c4784.03,3472.19) 4784.03,3478.19 cw(c4784.03,3472.19) 4790.03,3472.19 4790.03,3454.57 ccw(c4796.03,3454.57) 4796.03,3448.57 ccw(c4796.03,3454.57) 4802.03,3454.57 4802.03,3472.19 cw(c4808.03,3472.19) 4808.03,3478.19 cw(c4808.03,3472.19) 4814.03,3472.19 4814.03,3454.57 ccw(c4820.03,3454.57) 4820.03,3448.57 ccw(c4820.03,3454.57) 4826.03,3454.57 4826.03,3472.19 cw(c4832.03,3472.19) 4832.03,3478.19 cw(c4832.03,3472.19) 4838.03,3472.19 4838.03,3454.57 ccw(c4844.03,3454.57) 4844.03,3448.57 ccw(c4844.03,3454.57) 4850.03,3454.57 4850.03,3472.19 cw(c4856.03,3472.19) 4856.03,3478.19 cw(c4856.03,3472.19) 4862.03,3472.19 4862.03,3452.68 ccw(c4866.14,3452.68) 4866.14,3448.57 4896.39,3448.57 4904.52,3456.69 5070.87,3456.69 5182.48,3345.08
  Bottom Layer w6: v1(4722.44,3537.4) 4722.44,3458.66 v1(4724.41,3456.69)
USB1D4: Q1.E9 Q9.7 | length 1213.8
  Top Layer w5: v1(5036.22,2889.76) Q1.E9@5051.97,2874.02
  Top Layer w6: v1(4740.16,3330.71) 4742.28,3332.83 4893.91,3332.83 4915.51,3311.23 4915.51,3202.6 v1(5007.87,3110.24) ; v1(4742.13,3553.15) Q9.7@4742.13,3580.71
  Bottom Layer w4: v1(5007.87,3110.24) 4998.23,3100.59 4998.23,3035.68 5021.22,3012.68 5021.22,2904.76 v1(5036.22,2889.76)
  Bottom Layer w6: v1(4740.16,3330.71) 4742.13,3332.68 4742.13,3338.58 4742.13,3345.56 ccw(c4729.13,3345.56) 4729.13,3358.56 4727.39,3358.56 cw(c4727.39,3371.56) 4714.39,3371.56 cw(c4727.39,3371.56) 4727.39,3384.56 4742.13,3384.56 4769.11,3384.56 ccw(c4769.11,3397.56) 4782.11,3397.56 ccw(c4769.11,3397.56) 4769.11,3410.56 4742.13,3410.56 4725.75,3410.56 cw(c4725.75,3423.56) 4712.75,3423.56 cw(c4725.75,3423.56) 4725.75,3436.56 4742.13,3436.56 4769.11,3436.56 ccw(c4769.11,3449.56) 4782.11,3449.56 ccw(c4769.11,3449.56) 4769.11,3462.56 4755.13,3462.56 cw(c4755.13,3475.56) 4742.13,3475.56 cw(c4755.13,3475.56) 4755.13,3488.56 4769.11,3488.56 ccw(c4769.11,3501.56) 4782.11,3501.56 ccw(c4769.11,3501.56) 4769.11,3514.56 4755.13,3514.56 cw(c4755.13,3527.56) 4742.13,3527.56 v1(4742.13,3553.15)
USB1D5: Q1.C9 Q9.9 | length 1418.7
  Top Layer w4: 4973.23,3121.26 4973.23,2996.13 4983.23,2986.13 4990.98,2986.13 5006.6,2970.5 5025.63,2970.5 5034.35,2961.78 5034.35,2954.63 Q1.C9@5051.97,2937.01
  Top Layer w6: Q9.9@4791.34,3616.14 v1(4824.8,3616.14) ; v1(4850.39,3314.96) 4897.64,3314.96 4905.51,3307.09 4905.51,3188.98 4973.23,3121.26
  Bottom Layer w6: v1(4824.8,3616.14) 4850.39,3590.55 cw(c4837.39,3590.55) 4837.39,3577.55 4803.39,3577.55 ccw(c4803.39,3564.55) 4790.39,3564.55 ccw(c4803.39,3564.55) 4803.39,3551.55 4850.39,3551.55 4850.77,3551.55 cw(c4850.77,3538.55) 4863.77,3538.55 cw(c4850.77,3538.55) 4850.77,3525.55 4850.39,3525.55 4803.39,3525.55 ccw(c4803.39,3512.55) 4790.39,3512.55 ccw(c4803.39,3512.55) 4803.39,3499.55 4850.39,3499.55 4850.77,3499.55 cw(c4850.77,3486.55) 4863.77,3486.55 cw(c4850.77,3486.55) 4850.77,3473.55 4850.39,3473.55 4803.39,3473.55 ccw(c4803.39,3460.55) 4790.39,3460.55 ccw(c4803.39,3460.55) 4803.39,3447.55 4850.39,3447.55 4850.77,3447.55 cw(c4850.77,3434.55) 4863.77,3434.55 cw(c4850.77,3434.55) 4850.77,3421.55 4850.39,3421.55 4803.39,3421.55 ccw(c4803.39,3408.55) 4790.39,3408.55 ccw(c4803.39,3408.55) 4803.39,3395.55 4837.39,3395.55 cw(c4837.39,3382.55) 4850.39,3382.55 cw(c4837.39,3382.55) 4837.39,3369.55 4803.39,3369.55 ccw(c4803.39,3356.55) 4790.39,3356.55 ccw(c4803.39,3356.55) 4803.39,3343.55 4837.39,3343.55 cw(c4837.39,3330.55) 4850.39,3330.55 4850.39,3322.83 v1(4850.39,3314.96)
USB1D6: Q1.D10 Q9.10 | length 1089.1
  Top Layer w5: v1(5067.72,2921.26) Q1.D10@5083.46,2905.51
  Top Layer w6: Q9.10@4791.34,3635.83 4816.93,3635.83 4954.72,3635.83 4976.38,3614.17 4976.38,3574.8 4968.5,3566.93 v1(4874.02,3566.93) ; v1(4874.02,3377.95) 4877.07,3377.95 4935.51,3319.51 4935.51,3277.09 v1(4992.13,3220.47)
  Bottom Layer w4: v1(4992.13,3220.47) 5039.37,3173.23 5039.37,3125.41 5047.37,3117.41 5047.37,2942.64 5067.72,2922.29 v1(5067.72,2921.26)
  Bottom Layer w6: v1@4873.76,3566.93 4873.76,3378.2 v1(4874.02,3377.95)
USB1D7: Q1.C13 Q9.13 | length 1105.8
  Top Layer w5: Q1.C13@5177.95,2937.01 v1(5193.7,2952.76)
  Top Layer w6: Q9.13@4791.34,3694.88 v1(4824.8,3694.88) ; v1(4889.76,3464.57) 4897.64,3472.44 5070.87,3472.44 5196.85,3346.46 5196.85,3341.6 5216.94,3321.51 v1(5216.94,3311.43)
  Bottom Layer w4: v1(5193.7,2952.76) 5193.7,3225.95 5216.94,3249.19 v1(5216.94,3311.43)
  Bottom Layer w6: v1(4824.8,3694.88) 4856.3,3694.88 4890.02,3661.17 4890.02,3464.82 v1(4889.76,3464.57)
USB1DIR: Q1.C15 Q9.31 | length 1317
  Top Layer w5: v1(5225.2,2952.76) Q1.C15@5240.95,2937.01
  Top Layer w6: v1(4564.96,3635.83) Q9.31@4594.49,3635.83 ; v1(4582.68,3496.06) 4585.63,3499.01 4892.72,3499.01 5075.79,3499.01 v1(5244.09,3330.71)
  Bottom Layer w4: v1(5225.2,2952.76) 5232.94,2960.5 5232.94,3291.5 5244.09,3302.65 v1(5244.09,3330.71)
  Bottom Layer w6: v1(4564.96,3635.83) 4582.68,3618.11 v1(4582.68,3496.06)
USB1NXT: Q1.B12 Q9.2 | length 1104.2
  Top Layer w6: Q9.2@4643.7,3580.71 4643.7,3537.4 v1(4645.67,3535.43) ; v1(4645.67,3433.07) 4645.92,3432.82 4930.49,3432.82 4940.74,3443.07 5067.13,3443.07 5173.48,3336.72 5173.48,3173.48 5161.17,3161.17 5161.17,3094.65 5161.33,3094.49 5161.33,2983.38 Q1.B12@5146.46,2968.5
  Bottom Layer w6: v1(4645.67,3433.07) v1(4645.67,3535.43)
USB1RESET: D4.1 Q1.A5 Q9.27 R70.2 | length 1386.4
  Top Layer w4: v1(4415.35,3742.13) R70.2@4503.94,3742.13 ; D4.1@4474.41,3899.61 4474.41,3771.65 R70.2@4503.94,3742.13 ; Q9.27@4594.49,3714.57 4531.5,3714.57 R70.2@4503.94,3742.13 ; v1(4748.03,3251.97) 4804.14,3251.97 4929.13,3126.98 Q1.A5@4929.13,3003.15
  Bottom Layer w4: v1(4415.35,3742.13) 4415.35,3513.78 4677.17,3251.97 v1(4748.03,3251.97)
USB1STP: Q1.D15 Q9.29 | length 1471.8
  Top Layer w5: Q1.D15@5240.95,2905.51 v1(5256.69,2921.26)
  Top Layer w6: v1(4527.81,3519.43) 4976.13,3519.43 4976.38,3519.68 5078.74,3519.68 5260.09,3338.33 5260.09,3307.34 v1(5259.84,3307.09) ; v1(4564.96,3675.2) Q9.29@4594.49,3675.2
  Bottom Layer w4: v1(5256.69,2921.26) 5256.69,2931.54 5240.94,2947.29 5240.94,3288.19 v1(5259.84,3307.09)
  Bottom Layer w6: v1(4527.81,3519.43) 4527.81,3654.77 4544.55,3671.51 4561.28,3671.51 v1(4564.96,3675.2)
USBCLK: Q8.1 Q9.1 R75.2 | length 740
  Top Layer w4: v1(4968.5,3748.03) 4970.47,3746.06 Q8.1@5025.59,3746.06
  Top Layer w6: R75.2@4472.44,3551.18 4566.93,3551.18 4596.46,3580.71 Q9.1@4624.02,3580.71 4624.02,3553.15 v1(4622.05,3551.18)
  Bottom Layer w4: v1(4622.05,3551.18) 4653.54,3582.68 4748.03,3582.68 4771.65,3606.3 4771.65,3708.66 4811.02,3748.03 v1(4968.5,3748.03)
USBTCK: Q6.24 R44.1 | length 105.1
  Top Layer w4: v1(4273.62,3348.43) Q6.24@4273.62,3407.48
  Bottom Layer w4: v1(4273.62,3348.43) 4273.62,3338.58 R44.1@4299.21,3312.99
USBTDI: Q6.23 R45.1 | length 98.6
  Top Layer w4: v1(4253.94,3360.24) Q6.23@4253.94,3407.48
  Bottom Layer w4: R45.1@4244.09,3312.99 4253.94,3322.83 v1(4253.94,3360.24)
USBTMS: Q6.21 R47.1 | length 105.1
  Top Layer w4: v1(4214.57,3362.2) Q6.21@4214.57,3407.48
  Bottom Layer w4: R47.1@4188.98,3312.99 4188.98,3336.61 v1(4214.57,3362.2)
VCCPLL: C38.2 C59.2 L1.2 Q1.G13 | length 89.9
  Top Layer w5: Q1.G13@5177.95,2811.02 v1(5193.7,2826.77)
  Bottom Layer w5: C38.2@5133.86,2815.55 5150.55,2815.55 5154.33,2811.78 5178.7,2811.78 v1(5193.7,2826.77)
VINTOK: Q20.2
VTT: C117.1 C118.1 C122.2 C123.2 C124.2 C125.2 Q19.4 R7.2 R8.2 R9.2 R10.2 R11.2 R12.2 R13.2 R14.2 R15.2 R16.2 R17.2 R18.2 R19.2 R20.2 R21.2 R22.2 R23.2 R24.2 R25.2 R26.2 R27.2 R28.2 R29.2 R30.2 R31.2 R32.2 R33.2 R85.2 | length 3031.9
  Top Layer w6: 6078.74,1874.02 6078.74,2165.35 6086.61,2173.23 v1(6220.47,2173.23)
  Top Layer w10: 6078.74,1874.02 6099.02,1853.74 R16.2@6157.48,1853.74 R24.2@6196.85,1853.74 R22.2@6236.22,1853.74 ; R33.2@6275.59,1853.74 R22.2@6236.22,1853.74 ; v1(6716.54,1968.5) 6712.01,1963.98 R23.2@6661.42,1963.98 6661.42,1874.02 6649.02,1861.61 R31.2@6582.68,1861.61 R9.2@6543.31,1861.61 R26.2@6503.94,1861.61 R19.2@6464.57,1861.61 R15.2@6425.2,1861.61 6397.05,1861.61 6390.35,1854.92 6390.35,1767.13 R7.2@6354.33,1767.13 6350.98,1763.78 6236.22,1763.78 v1(6236.22,1811.02) R22.2@6236.22,1853.74
  Top Layer w15: v1(7023.62,2086.61) C117.1@7023.62,2168.5
  Bottom Layer w4: R28.2@6271.06,2267.72 6234.24,2267.72 6210.62,2291.34 R20.2@6209.25,2291.34 6209.25,2285.58 6189.72,2266.06 6189.72,2188.23 6196.72,2181.23 6212.47,2181.23 v1(6220.47,2173.23) 6240.75,2173.23 C123.2@6251.97,2184.45 R30.2@6291.34,2184.45 6330.71,2223.82 R12.2@6330.71,2225
  Bottom Layer w10: R18.2@6196.85,1853.74 R14.2@6236.22,1853.74 v1(6236.22,1811.02) ; R25.2@6637.8,2050.59 R10.2@6677.17,2050.59 R29.2@6716.54,2050.59 ; v1(6716.54,1968.5) R29.2@6716.54,2050.59 ; C122.2@6791.93,2401.57 R21.2@6791.93,2362.2 R27.2@6791.93,2322.83 R32.2@6791.93,2283.46 6791.93,2264.37 6779.53,2251.97 R17.2@6760.43,2251.97 R13.2@6760.43,2212.6 R8.2@6760.43,2173.23 6760.43,2086.61 6760.43,2059.65 6751.38,2050.59 R29.2@6716.54,2050.59
  Bottom Layer w15: 6760.43,2086.61 6960.63,2086.61 ; 6881.89,2086.61 R85.2@6881.89,2167.32 ; C118.1@6960.63,2155.51 6960.63,2086.61 ; Q19.4@7058.86,2181.1 7058.86,2090.35 7055.12,2086.61 v1(7023.62,2086.61) 6960.63,2086.61
WE: Q1.R19 Q2.L3 Q3.L3 R18.1 | length 4426.4
  Top Layer w4: Q1.R19@5366.93,2559.05 v1(5382.68,2543.31) ; v1(5724.41,2409.45) 5736.68,2409.45 5744.56,2401.57 5852.59,2401.57 ccw(c5852.59,2405.57) 5856.59,2405.57 5856.59,2408.11 cw(c5860.59,2408.11) 5860.59,2412.11 cw(c5860.59,2408.11) 5864.59,2408.11 5864.59,2405.57 ccw(c5868.59,2405.57) 5868.59,2401.57 5884.59,2401.57 ccw(c5884.59,2405.57) 5888.59,2405.57 5888.59,2407.89 cw(c5892.59,2407.89) 5892.59,2411.89 cw(c5892.59,2407.89) 5896.59,2407.89 5896.59,2405.57 ccw(c5900.59,2405.57) 5900.59,2401.57 ccw(c5900.59,2405.57) 5904.59,2405.57 5904.59,2413.89 cw(c5908.59,2413.89) 5908.59,2417.89 cw(c5908.59,2413.89) 5912.59,2413.89 5912.59,2405.57 ccw(c5916.59,2405.57) 5916.59,2401.57 ccw(c5916.59,2405.57) 5920.59,2405.57 5920.59,2421.07 cw(c5924.59,2421.07) 5924.59,2425.07 cw(c5924.59,2421.07) 5928.59,2421.07 5928.59,2405.57 ccw(c5932.59,2405.57) 5932.59,2401.57 ccw(c5932.59,2405.57) 5936.59,2405.57 5936.59,2421.07 cw(c5940.59,2421.07) 5940.59,2425.07 cw(c5940.59,2421.07) 5944.59,2421.07 5944.59,2405.57 ccw(c5948.59,2405.57) 5948.59,2401.57 5960.63,2401.57 5976.38,2417.32 6204.98,2417.32 ccw(c6204.98,2421.32) 6208.98,2421.32 6208.98,2444.15 cw(c6212.98,2444.15) 6212.98,2448.15 cw(c6212.98,2444.15) 6216.98,2444.15 6216.98,2392.43 ccw(c6220.98,2392.43) 6220.98,2388.43 ccw(c6220.98,2392.43) 6224.98,2392.43 6224.98,2438.58 cw(c6228.98,2438.58) 6228.98,2442.58 cw(c6228.98,2438.58) 6232.98,2438.58 6232.98,2398.12 ccw(c6236.98,2398.12) 6236.98,2394.12 ccw(c6236.98,2398.12) 6240.98,2398.12 6240.98,2435.26 cw(c6244.98,2435.26) 6244.98,2439.26 cw(c6244.98,2435.26) 6248.98,2435.26 6248.98,2421.32 ccw(c6252.98,2421.32) 6252.98,2417.32 6265.31,2417.32 cw(c6265.31,2407.79) 6274.84,2407.79 6274.84,2392.95 cw(c6267.72,2392.95) 6267.72,2385.83 ccw(c6267.72,2377.95) 6259.84,2377.95 cw(c6251.97,2377.95) 6251.97,2370.08 6244.09,2370.08 ccw(c6244.09,2362.2) 6236.22,2362.2 6236.22,2354.33 ccw(c6244.09,2354.33) 6244.09,2346.46 ccw(c6244.09,2354.33) 6251.97,2354.33 cw(c6259.84,2354.33) 6259.84,2362.2 cw(c6259.84,2354.33) 6267.72,2354.33 ccw(c6275.59,2354.33) 6275.59,2346.46 ccw(c6275.59,2354.33) 6283.46,2354.33 ccw(c6279.46,2354.33) 6279.46,2358.33 6279.39,2358.33 cw(c6279.39,2362.33) 6275.39,2362.33 cw(c6279.39,2362.33) 6279.39,2366.33 6287.54,2366.33 ccw(c6287.54,2370.33) 6291.54,2370.33 ccw(c6287.54,2370.33) 6287.54,2374.33 6279.39,2374.33 cw(c6279.39,2378.33) 6275.39,2378.33 cw(c6279.39,2378.33) 6279.39,2382.33 6279.46,2382.33 ccw(c6279.46,2386.33) 6283.46,2386.33 6283.46,2409.07 ccw(c6283.46,2413.07) 6283.46,2417.07 cw(c6283.46,2421.07) 6283.46,2425.07 v1(6283.46,2440.94) ; v1(6173.23,2133.86) 6181.1,2141.73 6228.35,2141.73 6236.22,2133.86 ; v1@6236.22,2098.36 v1(6236.22,2102.36) 6236.22,2133.86 ; Q3.L3@6251.97,2118.11 6251.97,2133.86 ccw(c6244.09,2133.86) 6244.09,2141.73 ccw(c6244.09,2133.86) 6236.22,2133.86 ; Q2.L3@6251.97,2803.15 v1(6267.72,2787.4)
  Bottom Layer w4: v1(5382.68,2543.31) 5398.43,2527.56 5420.43,2527.56 cw(c5420.43,2520.69) 5427.3,2520.69 ccw(c5434.3,2520.69) 5434.3,2513.69 ccw(c5434.3,2520.69) 5441.3,2520.69 cw(c5448.17,2520.69) 5448.17,2527.56 5453.54,2527.56 5461.42,2519.69 5488.19,2519.69 5582.17,2425.7 5708.16,2425.7 v1(5724.41,2409.45) ; v1(6173.23,2133.86) 6157.48,2118.11 6157.48,1955.16 6196.85,1915.79 R18.1@6196.85,1894.29 ; v1(6236.22,2102.36) 6236.22,2029.09 6251.22,2014.09 6251.22,1992.87 6299.59,1944.5 6471.07,1944.5 6590.69,2064.12 6590.69,2789.29 6505.58,2874.4 6353.69,2874.4 6320.85,2841.56 cw(c6318.02,2844.39) 6315.19,2841.56 6312.52,2844.23 ccw(c6309.69,2841.4) 6306.86,2844.23 ccw(c6309.69,2841.4) 6306.86,2838.58 6309.53,2835.9 cw(c6306.7,2833.08) 6309.53,2830.25 cw(c6306.7,2833.08) 6303.87,2830.25 6276.52,2857.61 ccw(c6273.69,2854.78) 6270.86,2857.61 ccw(c6273.69,2854.78) 6270.86,2851.95 6298.22,2824.59 cw(c6295.39,2821.76) 6298.22,2818.93 cw(c6295.39,2821.76) 6292.56,2818.93 6274.85,2836.64 ccw(c6272.02,2833.81) 6269.19,2836.64 ccw(c6272.02,2833.81) 6269.19,2830.99 6286.9,2813.28 cw(c6284.08,2810.45) 6286.9,2807.62 cw(c6284.08,2810.45) 6281.25,2807.62 6274.85,2814.02 ccw(c6272.02,2811.19) 6269.19,2814.02 ccw(c6272.02,2811.19) 6269.19,2808.36 6275.59,2801.96 cw(c6272.76,2799.13) 6275.59,2796.31 6267.72,2788.43 v1(6267.72,2787.4) 6267.72,2779.53 6283.46,2763.78 6283.46,2748.03 cw(c6283.46,2744.03) 6283.46,2740.03 ccw(c6283.46,2736.03) 6283.46,2732.03 cw(c6283.46,2728.03) 6283.46,2724.03 ccw(c6283.46,2720.03) 6283.46,2716.03 6283.46,2708.03 ccw(c6283.46,2704.03) 6283.46,2700.03 6283.46,2688.94 cw(c6283.46,2684.94) 6283.46,2680.94 ccw(c6283.46,2676.94) 6283.46,2672.94 cw(c6283.46,2668.94) 6283.46,2664.94 ccw(c6283.46,2660.94) 6283.46,2656.94 cw(c6283.46,2652.94) 6283.46,2648.94 ccw(c6283.46,2644.94) 6283.46,2640.94 cw(c6283.46,2636.94) 6283.46,2632.94 ccw(c6283.46,2628.94) 6283.46,2624.94 cw(c6283.46,2620.94) 6283.46,2616.94 ccw(c6283.46,2612.94) 6283.46,2608.94 cw(c6283.46,2604.94) 6283.46,2600.94 ccw(c6283.46,2596.94) 6283.46,2592.94 cw(c6283.46,2588.94) 6283.46,2584.94 ccw(c6283.46,2580.94) 6283.46,2576.94 cw(c6283.46,2572.94) 6283.46,2568.94 ccw(c6283.46,2564.94) 6283.46,2560.94 cw(c6283.46,2556.94) 6283.46,2552.94 ccw(c6283.46,2548.94) 6283.46,2544.94 cw(c6283.46,2540.94) 6283.46,2536.94 ccw(c6283.46,2532.94) 6283.46,2528.94 cw(c6283.46,2524.94) 6283.46,2520.94 ccw(c6283.46,2516.94) 6283.46,2512.94 6283.46,2504.94 ccw(c6283.46,2500.94) 6283.46,2496.94 cw(c6283.46,2492.94) 6283.46,2488.94 ccw(c6283.46,2484.94) 6283.46,2480.94 cw(c6283.46,2476.94) 6283.46,2472.94 ccw(c6283.46,2468.94) 6283.46,2464.94 cw(c6283.46,2460.94) 6283.46,2456.94 v1(6283.46,2440.94)
ZQ0: Q2.L8 R3.2 | length 209.2
  Top Layer w4: v1(6173.23,3015.75) 6188.98,3015.75 6204.72,3000 6204.72,2984.25 6212.6,2976.38 6236.22,2976.38 Q2.L8@6251.97,2960.63
  Bottom Layer w10: R3.2@6124.02,3078.74 6149.61,3078.74 6173.23,3055.12 v1(6173.23,3015.75)
ZQ1: Q3.L8 R4.2 | length 313.8
  Top Layer w4: 6181.1,2204.47 6189.23,2212.6 6212.6,2212.6 6239.08,2239.08 6239.08,2249.43 6251.97,2262.32 Q3.L8@6251.97,2275.59
  Top Layer w6: v1(6023.62,2212.6) 6031.75,2204.47 6181.1,2204.47
  Bottom Layer w4: R4.2@6005.91,2181.1 6023.62,2198.82 v1(6023.62,2212.6)
pads on no net: C23.0 C24.0 C46.0 C47.0 C49.0 C50.0 C51.0 C52.0 C53.0 C54.0 C55.0 C56.0 C57.0 C58.0 C59.0 C60.0 C61.0 C62.0 C63.0 C64.0 C66.0 C67.0 C70.0 C77.0 C78.0 C96.0 C97.0 C103.0 C108.0 C109.0 C110.0 C111.0 C112.0 C113.0 C115.0 C116.0 C118.0 C120.0 C121.0 C126.0 C127.0 C128.0 C129.0 C130.0 C131.0 C132.0 C133.0 C134.0 C135.0 C136.0 C137.0 C138.0 C139.0 C142.0 C145.0 C154.0 D1.0 D2.0 D3.0 D4.0 D5.0 D6.0 J4.17 J4.CD J4.WP J5.13 J5.14 L1.0 L2.0 L3.0 P2.5 P2.6 Q1.A1 Q1.A2 Q1.A7 Q1.AA11 Q1.AA12 Q1.AA14 Q1.AA15 Q1.AA16 Q1.AA17 Q1.AA19 Q1.AA20 Q1.AB11 Q1.AB12 Q1.AB13 Q1.AB14 Q1.AB16 Q1.AB17 Q1.AB18 Q1.AB19 Q1.AB21 Q1.AB22 Q1.B1 Q1.B2 Q1.B7 Q1.B8 Q1.C1 Q1.C3 Q1.C4 Q1.C5 Q1.C6 Q1.C8 Q1.D1 Q1.D2 Q1.D3 Q1.D5 Q1.D6 Q1.D7 Q1.D8 Q1.E2 Q1.E3 Q1.E4 Q1.E5 Q1.E7 Q1.E8 Q1.F1 Q1.F2 Q1.F4 Q1.F5 Q1.F6 Q1.F7 Q1.G1 Q1.G2 Q1.G3 Q1.G4 Q1.G6 Q1.G7 Q1.G8 Q1.G17 Q1.H1 Q1.H3 Q1.H4 Q1.H5 Q1.H6 Q1.H8 Q1.J1 Q1.J2 Q1.J3 Q1.J5 Q1.J6 Q1.J7 Q1.J8 Q1.K2 Q1.K3 Q1.K4 Q1.K5 Q1.K7 Q1.K8 Q1.L1 Q1.L2 Q1.L4 Q1.L5 Q1.L6 Q1.L7 Q1.M1 Q1.M2 Q1.M3 Q1.M4 Q1.M6 Q1.M7 Q1.M8 Q1.N1 Q1.N3 Q1.N4 Q1.N5 Q1.N6 Q1.N8 Q1.P1 Q1.P2 Q1.P3 Q1.P5 Q1.P6 Q1.P7 Q1.P8 Q1.R2 Q1.R3 Q1.R4 Q1.R5 Q1.R7 Q1.R8 Q1.R17 Q1.T1 Q1.T2 Q1.T16 Q1.T17 Q1.U1 Q1.U2 Q1.U11 Q1.U12 Q1.U13 Q1.U14 Q1.U16 Q1.U17 Q1.U18 Q1.U19 Q1.V7 Q1.V11 Q1.V13 Q1.V14 Q1.V15 Q1.V16 Q1.V18 Q1.V19 Q1.W3 Q1.W4 Q1.W11 Q1.W12 Q1.W13 Q1.W15 Q1.W16 Q1.W17 Q1.W18 Q1.Y4 Q1.Y12 Q1.Y13 Q1.Y14 Q1.Y15 Q1.Y17 Q1.Y18 Q1.Y19 Q2.J1 Q2.J9 Q2.L1 Q2.L9 Q2.M7 Q3.J1 Q3.J9 Q3.L1 Q3.L9 Q3.M7 Q4.4 Q4.5 Q4.6 Q4.11 Q4.12 Q4.13 Q4.14 Q5.1 Q6.11 Q6.12 Q6.13 Q6.15 Q6.16 Q6.17 Q6.19 Q6.20 Q6.29 Q6.30 Q6.32 Q6.33 Q6.35 Q6.36 Q6.37 Q6.38 Q6.41 Q7.6 Q7.7 Q8.8 Q8.15 Q8.16 Q8.23 Q8.24 Q8.25 Q9.8 Q9.15 Q9.16 Q9.23 Q9.24 Q9.25 Q10.13 Q10.47 Q12.0 Q12.5 Q12.8 Q14.0 Q14.5 Q14.8 Q15.1 Q16.0 Q16.7 Q17.0 Q19.5 Q19.7 Q19.8 Q20.7 Q21.0 Q21.4 Q22.5 Q23.1 Q23.2 Q24.1 Q24.2 T1.0 Y1.0
copper on no net: | length 2601.6
  Top Layer w5: v1(4784.25,2511.81) 4800,2527.56 ; v1(4784.25,2574.8) 4800,2590.55 ; v1(4784.25,2606.3) 4800,2622.05 ; v1(4784.25,2637.79) 4800,2653.54 ; v1(4784.25,2700.79) 4800,2685.04 ; v1(4784.25,2763.78) 4800,2748.03 ; v1(4784.25,2795.28) 4800,2779.53 ; v1(4784.25,2826.77) 4800,2811.02 ; v1(4784.25,2858.27) 4800,2842.52 ; v1(4784.25,2921.26) 4800,2905.51 ; v1(4784.25,2952.76) 4800,2937.01 ; v1(4784.25,2984.25) 4800,2968.5 ; v1(4815.75,2511.81) 4831.5,2527.56 ; v1(4815.75,2543.31) 4831.5,2559.05 ; v1(4815.75,2574.8) 4831.5,2590.55 ; v1(4815.75,2637.79) 4831.5,2653.54 ; v1(4815.75,2700.79) 4831.5,2685.04 ; v1(4815.75,2732.28) 4831.5,2716.54 ; v1(4815.75,2763.78) 4831.5,2748.03 ; v1(4815.75,2826.77) 4831.5,2811.02 ; v1(4815.75,2858.27) 4831.5,2842.52 ; v1(4815.75,2889.76) 4831.5,2874.02 ; v1(4815.75,2921.26) 4831.5,2905.51 ; v1(4815.75,2984.25) 4831.5,2968.5 ; v1(4847.24,2543.31) 4862.99,2559.05 ; v1(4847.24,2574.8) 4862.99,2590.55 ; v1(4847.24,2606.3) 4862.99,2622.05 ; v1(4847.24,2637.79) 4862.99,2653.54 ; v1(4847.24,2732.28) 4862.99,2716.54 ; v1(4847.24,2763.78) 4862.99,2748.03 ; v1(4847.24,2795.28) 4862.99,2779.53 ; v1(4847.24,2826.77) 4862.99,2811.02 ; v1(4847.24,2889.76) 4862.99,2874.02 ; v1(4847.24,2921.26) 4862.99,2905.51 ; v1(4847.24,2952.76) 4862.99,2937.01 ; v1(4878.74,2543.31) 4894.49,2559.05 ; v1(4878.74,2606.3) 4894.49,2622.05 ; v1(4878.74,2637.79) 4894.49,2653.54 ; v1(4878.74,2700.79) 4894.49,2685.04 ; v1(4878.74,2732.28) 4894.49,2716.54 ; v1(4878.74,2795.28) 4894.49,2779.53 ; v1(4878.74,2826.77) 4894.49,2811.02 ; v1(4878.74,2858.27) 4894.49,2842.52 ; v1(4878.74,2889.76) 4894.49,2874.02 ; v1(4878.74,2952.76) 4894.49,2937.01 ; v1(4910.24,2543.31) 4925.98,2559.05 ; v1(4910.24,2574.8) 4925.98,2590.55 ; v1(4910.24,2606.3) 4925.98,2622.05 ; v1(4910.24,2700.79) 4925.98,2685.04 ; v1(4910.24,2732.28) 4925.98,2716.54 ; v1(4910.24,2763.78) 4925.98,2748.03 ; v1(4910.24,2795.28) 4925.98,2779.53 ; v1(4910.24,2858.27) 4925.98,2842.52 ; v1(4910.24,2889.76) 4925.98,2874.02 ; v1(4910.24,2921.26) 4925.98,2905.51 ; v1(4910.24,2952.76) 4925.98,2937.01 ; v1(4941.73,2574.8) 4957.48,2590.55 ; v1(4941.73,2606.3) 4957.48,2622.05 ; v1(4941.73,2637.79) 4957.48,2653.54 ; v1(4941.73,2700.79) 4957.48,2685.04 ; v1(4941.73,2763.78) 4957.48,2748.03 ; v1(4941.73,2795.28) 4957.48,2779.53 ; v1(4941.73,2826.77) 4957.48,2811.02 ; v1(4941.73,2858.27) 4957.48,2842.52 ; v1(4941.73,2921.26) 4957.48,2905.51 ; v1(4973.23,2543.31) 4988.98,2559.05 ; v1(4973.23,2574.8) 4988.98,2590.55 ; v1(4973.23,2637.79) 4988.98,2653.54 ; v1(4973.23,2700.79) 4988.98,2685.04 ; v1(4973.23,2732.28) 4988.98,2716.54 ; v1(4973.23,2763.78) 4988.98,2748.03 ; v1(5004.72,2543.31) 5020.47,2559.05 ; v1(5004.72,2574.8) 5020.47,2590.55 ; v1(5004.72,2606.3) 5020.47,2622.05 ; v1(5004.72,2637.79) 5020.47,2653.54 ; v1(5004.72,2732.28) 5020.47,2716.54 ; v1(5004.72,2763.78) 5020.47,2748.03 ; v1(5099.21,2322.83) 5114.96,2338.58 ; v1(5099.21,2354.33) 5114.96,2370.08 ; v1(5099.21,2417.32) 5114.96,2433.07 ; v1(5099.21,2480.31) 5114.96,2496.06 ; 5146.46,2338.58 v1(5162.21,2322.83) ; 5146.46,2370.08 v1(5162.21,2354.33) ; 5146.46,2401.57 v1(5162.21,2385.83) ; 5146.46,2433.07 v1(5162.21,2417.32) ; 5146.46,2496.06 v1(5162.21,2480.31) ; 5177.95,2338.58 v1(5193.7,2322.83) ; 5177.95,2401.57 v1(5193.7,2385.83) ; 5177.95,2433.07 v1(5193.7,2417.32) ; 5177.95,2464.57 v1(5193.7,2448.82) ; 5177.95,2496.06 v1(5193.7,2480.31) ; 5209.45,2338.58 v1(5225.2,2322.83) ; 5209.45,2370.08 v1(5225.2,2354.33) ; 5209.45,2401.57 v1(5225.2,2385.83) ; 5209.45,2464.57 v1(5225.2,2448.82) ; 5209.45,2496.06 v1(5225.2,2480.31) ; 5240.95,2370.08 v1(5256.69,2354.33) ; 5240.95,2401.57 v1(5256.69,2385.83) ; 5240.95,2433.07 v1(5256.69,2417.32) ; 5240.95,2464.57 v1(5256.69,2448.82) ; 5272.44,2338.58 v1(5288.19,2322.83) ; 5272.44,2370.08 v1(5288.19,2354.33) ; 5272.44,2433.07 v1(5288.19,2417.32) ; 5272.44,2464.57 v1(5288.19,2448.82) ; 5303.94,2338.58 v1(5319.69,2322.83) ; 5303.94,2370.08 v1(5319.69,2354.33) ; 5303.94,2401.57 v1(5319.69,2385.83) ; 5303.94,2433.07 v1(5319.69,2417.32) ; 5303.94,2496.06 v1(5319.69,2480.31) ; 5335.43,2338.58 v1(5351.18,2322.83) ; 5366.93,2338.58 v1(5382.68,2322.83) ; 5366.93,2370.08 v1(5382.68,2354.33) ; 5366.93,2401.57 v1(5382.68,2385.83) ; 5398.43,2370.08 v1(5414.17,2354.33) ; 5429.92,2338.58 v1(5445.67,2322.83) ; 5461.42,2338.58 v1(5477.17,2322.83)
  Bottom Layer w10: 5100,2000 5118.11,2000